# Altium PCB displaykort.PcbDoc
Units mil, origin at the board's own origin, x right, y up, seen from the top; angles counter-clockwise.
Board outline 2500 x 2500 mil, 2 copper layers (Top Layer, Bottom Layer); 12 components, 13 nets, 50 pads, 3 vias.
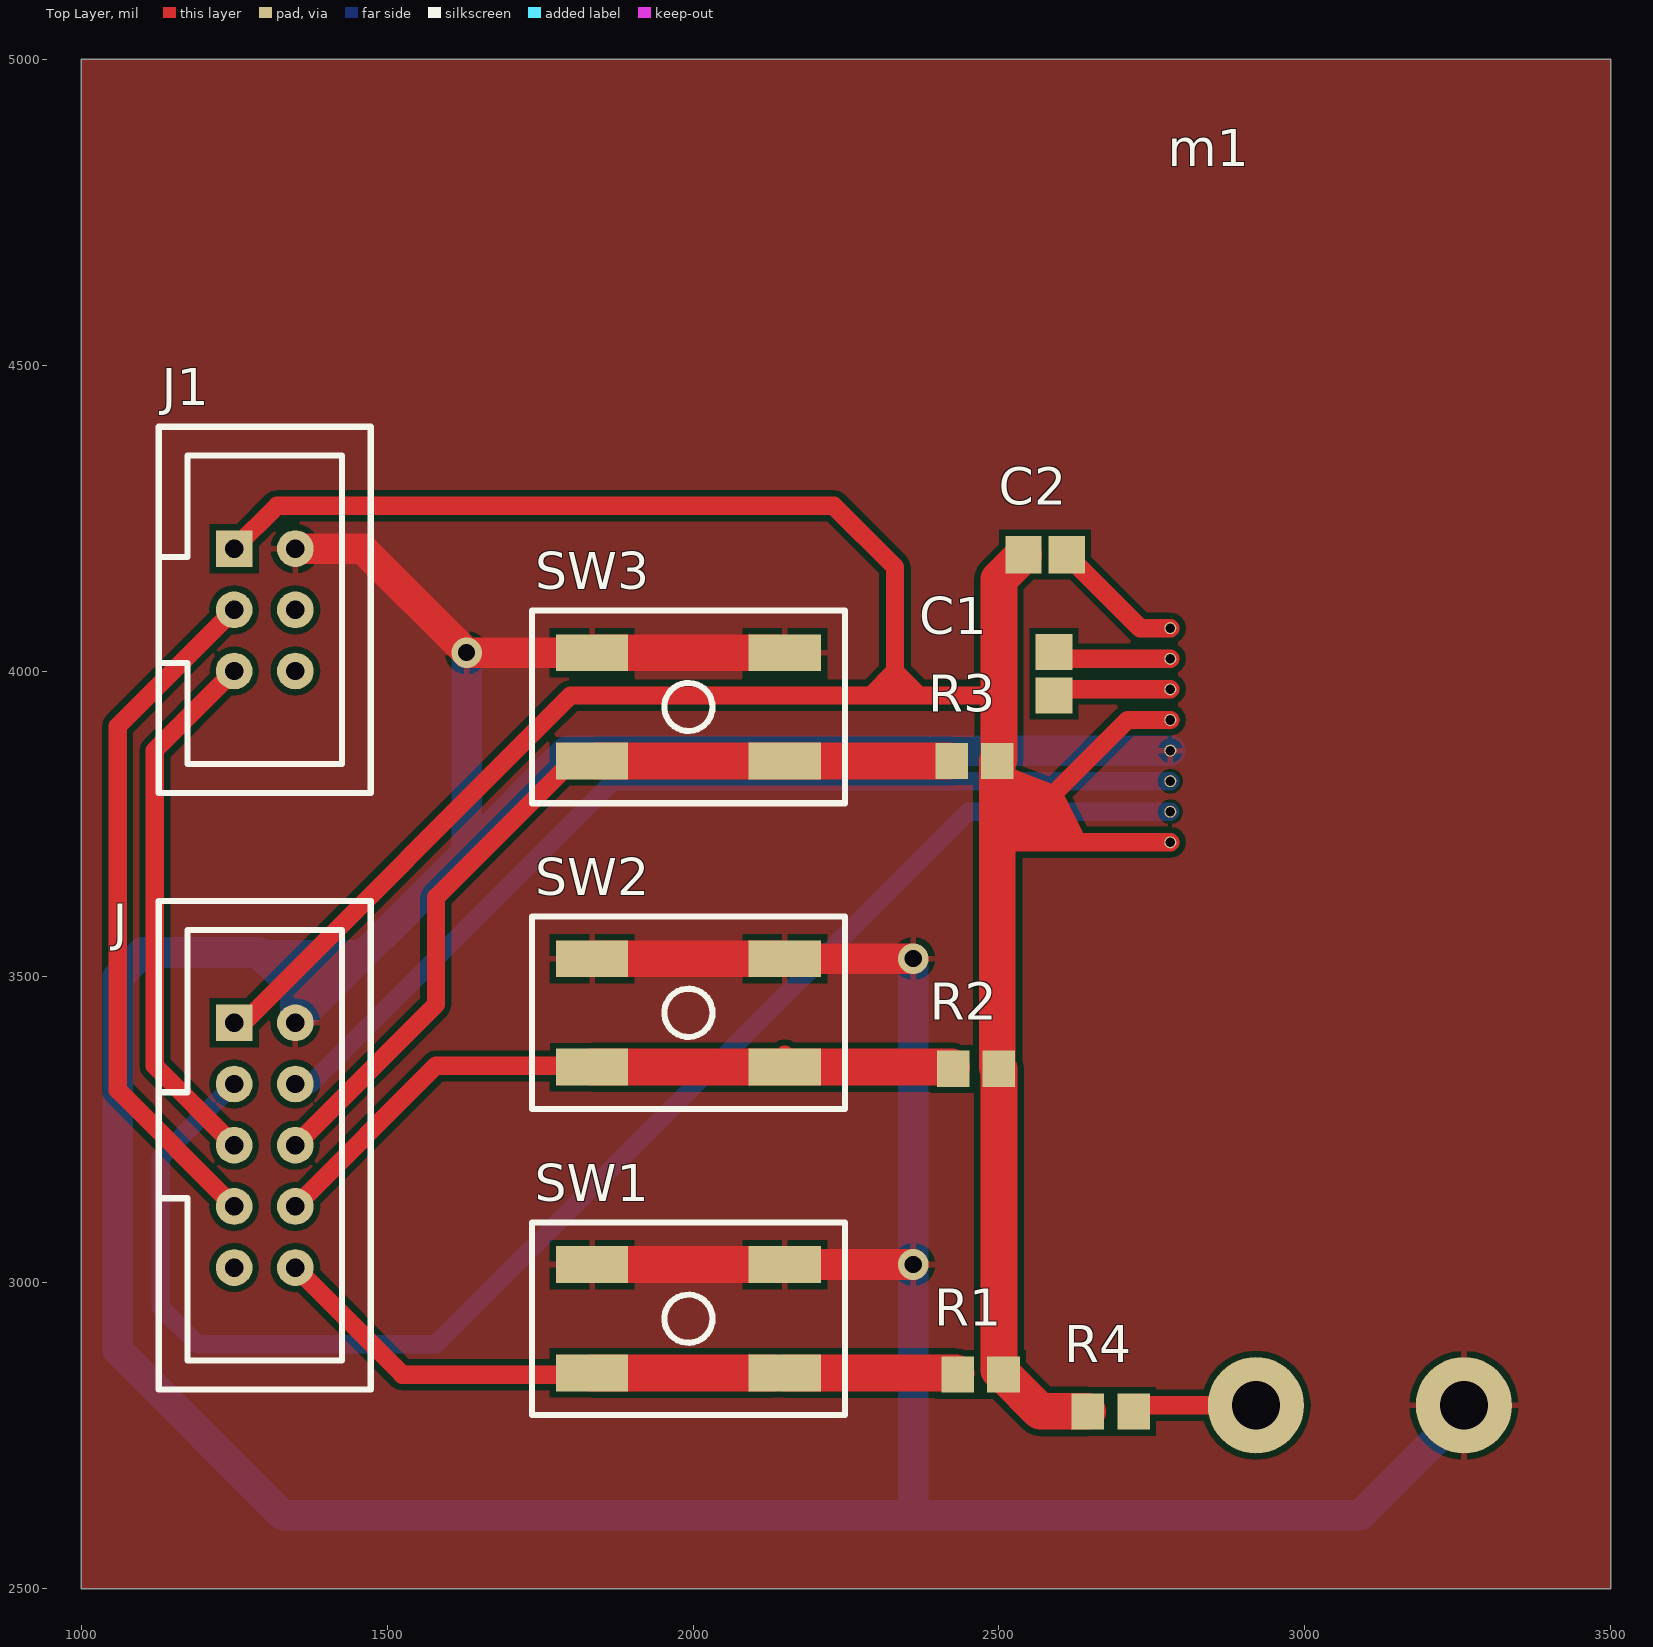
[diagram p0: Top Layer view]
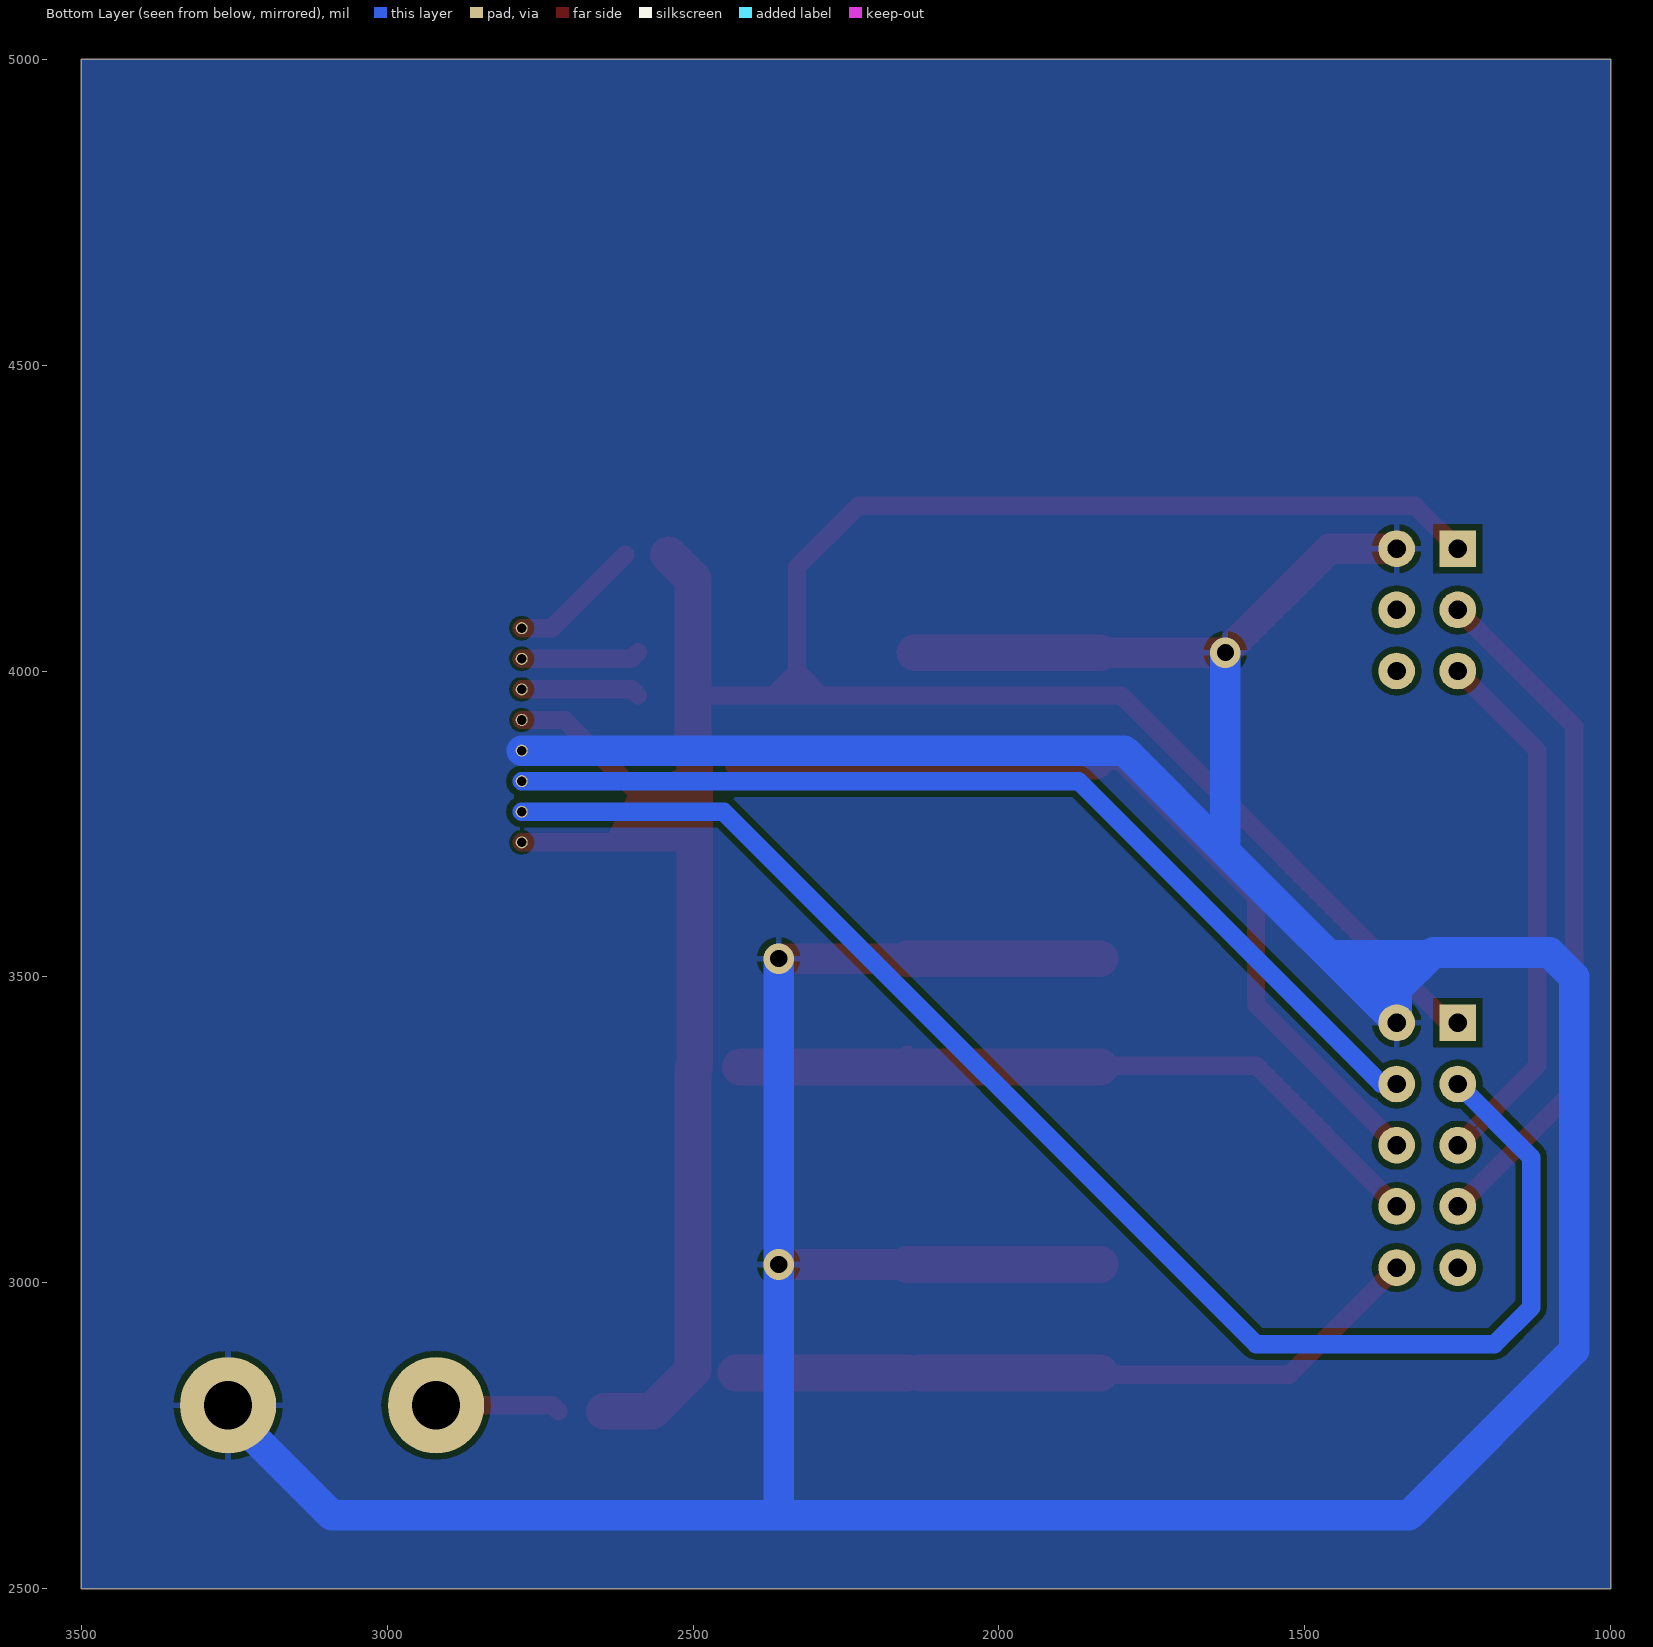
[diagram p1: Bottom Layer view, seen from below]

## Layer stack, top to bottom
Top Solder: solder mask 0.4, Solder Resist, Dk 3.5
Top Layer: signal copper 1.4
Dielectric 1: dielectric 12.6, FR-4, Dk 4.8
Bottom Layer: signal copper 1.4
Bottom Solder: solder mask 0.4, Solder Resist, Dk 3.5

## Board outline
1000,2500 1000,5000 3500,5000 3500,2500 1000,2500

## Design rules (kind name [scope] priority, off if disabled: settings)
Clearance [All] p1: gap=10
MinimumSolderMaskSliver [All] p1: minsoldermaskwidth=1
PlaneClearance [All] p1: clearance=30
PolygonConnect [All] p1: connectstyle=Relief reliefconductorwidth=10 reliefentries=4 polygonreliefangle="90 Angle" airgapwidth=10
RoutingVias [All] p1: holewidth=28 width=50 viastyle="Through Hole" minholewidth=28 minwidth=50 maxholewidth=28 maxwidth=50
SolderMaskExpansion [All] p1: expansion=4
Width [All] p1: maxlimit=60 minlimit=10 preferedwidth=30
28 further rules are at their usual default settings.

## Components (designator, comment, footprint, x,y, rotation, side; value= is the part's Value field where it differs from the comment)
C1 "CAP" CAPC2012X11M 2590,3995.43 r270 top
C2 "CAP" CAPC2012X11M 2575.43,4190 r180 top
J "IDC10" IDC10 1300,3225 r0 top
J1 "IDC6" IDC6 1300,4100 r0 top
m1 "midasdisp" PCBComponent_1 2155,3970 r270 top
R1 "RES" RESC2012X07M 2470,2850 r0 top
R2 "RES" RESC2012X07M 2462.6,3350 r0 top
R3 "RES" RESC2012X07M 2460,3853 r0 top
R4 "RES" RESC2012X07M 2682.6,2790 r0 top
SW1 "SWITCH" Switch_pad 1992.52,2941.42 r180 top
SW2 "SWITCH" Switch_pad 1992.52,3441.42 r180 top
SW3 "SWITCH" Switch_pad 1992.52,3941.42 r180 top

## Footprints (in the part's own frame and the unit in brackets; to place one, negate y for a bottom-side part, rotate by r counter-clockwise, add the part's x,y. Pads: shape width x height; smd on the part's side, far side on the other; paste and mask are expansions set on the pad)
CAPC2012X11M [mm] "Chip Capacitor, 2-Leads, Body 2,00x1,25mm, IPC Low Density"
  rect 1.5x1.55 smd: 1(-0.9,0) 2(0.9,0)
  body extent -1.1,-0.72 1.1,0.72, height 1.1
IDC6 [mil]
  rect 60x60 hole 30: 1(-50,100)
  round 60 hole 30: 2(50,100) 3(-50,0) 4(50,0) 5(-50,-100) 6(50,-100)
  silkscreen extent -173,-299 173,299, body extent -173,-299 173,299, height 358
IDC10 [mil]
  rect 60x60 hole 30: 1(-50,200)
  round 60 hole 30: 2(50,200) 3(-50,100) 4(50,100) 5(-50,0) 6(50,0) 7(-50,-100) 8(50,-100) 9(-50,-200) 10(50,-200)
  silkscreen extent -173,-399 173,399, body extent -173,-399 173,399, height 358
PCBComponent_1 [mm]
  round 0.5 hole 0.4: 1(-2.54,15.875) 2(-1.27,15.875) 3(0,15.875) 4(1.27,15.875) 5(2.54,15.875) 6(3.81,15.875) 7(5.08,15.875) 8(6.35,15.875)
  round 4 hole 2: 9(29.718,19.431) 10(29.718,28.067)
  body extent -20.96,16.51 30.1,33.66, height 6.3
RESC2012X07M [mm] "Chip Resistor, 2-Leads, Body 2,00x1,25mm, IPC Low Density"
  rect 1.35x1.5 smd: 1(-0.95,0) 2(0.95,0)
  body extent -1.08,-0.7 1.07,0.7, height 0.65
Switch_pad [mm]
  rect 3x1.524 smd: 1(-4,2.25) 1(4,2.25) 2(-4,-2.25) 2(4,-2.25)
  silkscreen extent -6.5,-4 6.5,4

## Part data
C1 C2: "Capacitor"
J: "10pin IDC connector"
J1: "6pin IDC connector"
R1 R2 R3 R4: "Resistor"
SW1 SW2 SW3: library part Switch, "Switch"

## Via types
v1: diameter 50, hole 28, Top Layer to Bottom Layer, 3 vias

## Nets (pads, with @x,y where several pads share a name; then routed paths per layer and width w, separated by ;. In a path a pad name is that pad's centre, name@x,y a point inside that pad or via, vN(x,y) a via of type N, cw(c..) or ccw(c..) an arc to the next point about the centre after c; other vN are vias at no path point)
GND: J1.2 J.2 m1.5 m1.10 SW1.2 SW2.2 SW3.2 | length 8145.8
  Top Layer w50: J1.2 1460,4200 v1(1630,4030) SW3.2@1835.04,4030 ; SW1.2@2150,3030 v1(2360,3030) ; SW2.2@2150,3530 v1(2360,3530)
  Top Layer w60: SW1.2@1835.04,3030 SW1.2@2150,3030 ; SW2.2@1835.04,3530 SW2.2@2150,3530 ; SW3.2@1835.04,4030 SW3.2@2137.48,4030
  Bottom Layer w50: v1(1630,4030) 1630,3705 ; v1(2360,3530) v1(2360,3030) 2360,2620 ; m1.5 1795,3870 1630,3705 ; m1.10 3260,2790 3090,2620 2360,2620 ; 1630,3705 J.2 1350,3480 1290,3540 1100,3540 1060,3500 1060,2890 1330,2620 2360,2620
NetC1_1: C1.1 m1.2 | length 194.5
  Top Layer w30: C1.1 2600.87,4020 m1.2
NetC1_2: C1.2 m1.3 | length 194.1
  Top Layer w30: C1.2 2600,3970 m1.3
NetC2_1: C2.1 m1.1 | length 218.8
  Top Layer w30: C2.1 2730.87,4070 m1.1
NetJ1_3: J1.3 J.7 | length 1132.4
  Top Layer w30: J.7 1060,3315 1060,3910 J1.3
NetJ1_5: J1.5 J.5 | length 882.7
  Top Layer w30: J.5 1120,3355 1120,3870 J1.5
NetJ_3: J.3 m1.7 | length 2449.9
  Bottom Layer w30: J.3 1130,3205 1130,2960 1190,2900 1580,2900 2450,3770 m1.7
NetJ_4: J.4 m1.6 | length 1635
  Bottom Layer w30: J.4 1375,3325 1870,3820 m1.6
NetJ_6: J.6 R3.1 SW3.1 | length 1436.9
  Top Layer w30: J.6 1580,3455 1580,3630 1803,3853 SW3.1@1842.52,3853 ; R3.1@2419.76,3852.83 R3.1@2422.6,3850
  Top Layer w60: SW3.1@1842.52,3853 SW3.1@2150.48,3853 ; SW3.1@2150,3852.83 R3.1@2419.76,3852.83
NetJ_8: J.8 R2.1 SW2.1 | length 1197.8
  Top Layer w30: J.8 1580,3355 1832.87,3355 SW2.1@1835.04,3352.83 ; SW2.1@2132.17,3355 SW2.1@2150,3372.83 ; R2.1@2422.36,3352.83 R2.1
  Top Layer w60: SW2.1@1835.04,3352.83 2150,3352.83 R2.1@2422.36,3352.83
NetJ_10: J.10 R1.1 SW1.1 | length 1157.4
  Top Layer w30: J.10 1525,2850 1832.2,2850 SW1.1@1835.04,2852.83 ; SW1.1@2130,2852.83 SW1.1@2150,2852.83 ; R1.1@2429.76,2852.83 R1.1
  Top Layer w60: SW1.1@1835.04,2852.83 SW1.1@2130,2852.83 ; SW1.1@2150,2852.83 R1.1@2429.76,2852.83
Netm1_9: m1.9 R4.2 | length 204.1
  Top Layer w30: R4.2 2730,2800 m1.9
VCC: C2.2 J1.1 J.1 m1.4 m1.8 R1.2 R2.2 R3.2 R4.1 | length 4989.3
  Top Layer w30: J.1 1265,3425 1800,3960 2330,3960 ; J1.1 1320,4270 2230,4270 2330,4170 2330,3960 ; R2.2@2497.4,3352.6 R2.2 ; 2497.4,3720 2510,3720 ; R3.2@2497.4,3850 R3.2 ; 2497.4,3960 2330,3960 ; R1.2@2500,2857.4 R1.2 ; m1.8 2510,3720 ; m1.4 2710,3920 2510,3720
  Top Layer w60: R2.2@2497.4,3352.6 2497.4,3720 R3.2@2497.4,3850 ; R3.2 2500,3855.6 2500,4150 C2.2 ; R1.2@2500,2857.4 R2.2 ; R1.2 2567.4,2790 R4.1
pads on no net: J1.4 J1.6 J.9

## Polygon pours and split planes (outlines as drawn)
GND on Bottom Layer "Bottom Layer-gnd" (solid, pour order 0): 1000,5000 3500,5000 3500,2500 1000,2500
GND on Top Layer "Top Layer-gnd" (solid, pour order 2): 1000,5000 3500,5000 3500,2500 1000,2500

## Other copper
Top Layer:
  region net VCC: 2270,3960 2330,4020 2390,3960
  region net VCC: 2510,3720 2497.4,3850 2600,3810 2645,3720
Bottom Layer:
  region net GND: 1300,3560 1380,3560 1480,3560 1390,3470 1350,3470